# Allegro board probe_d_F2.brd
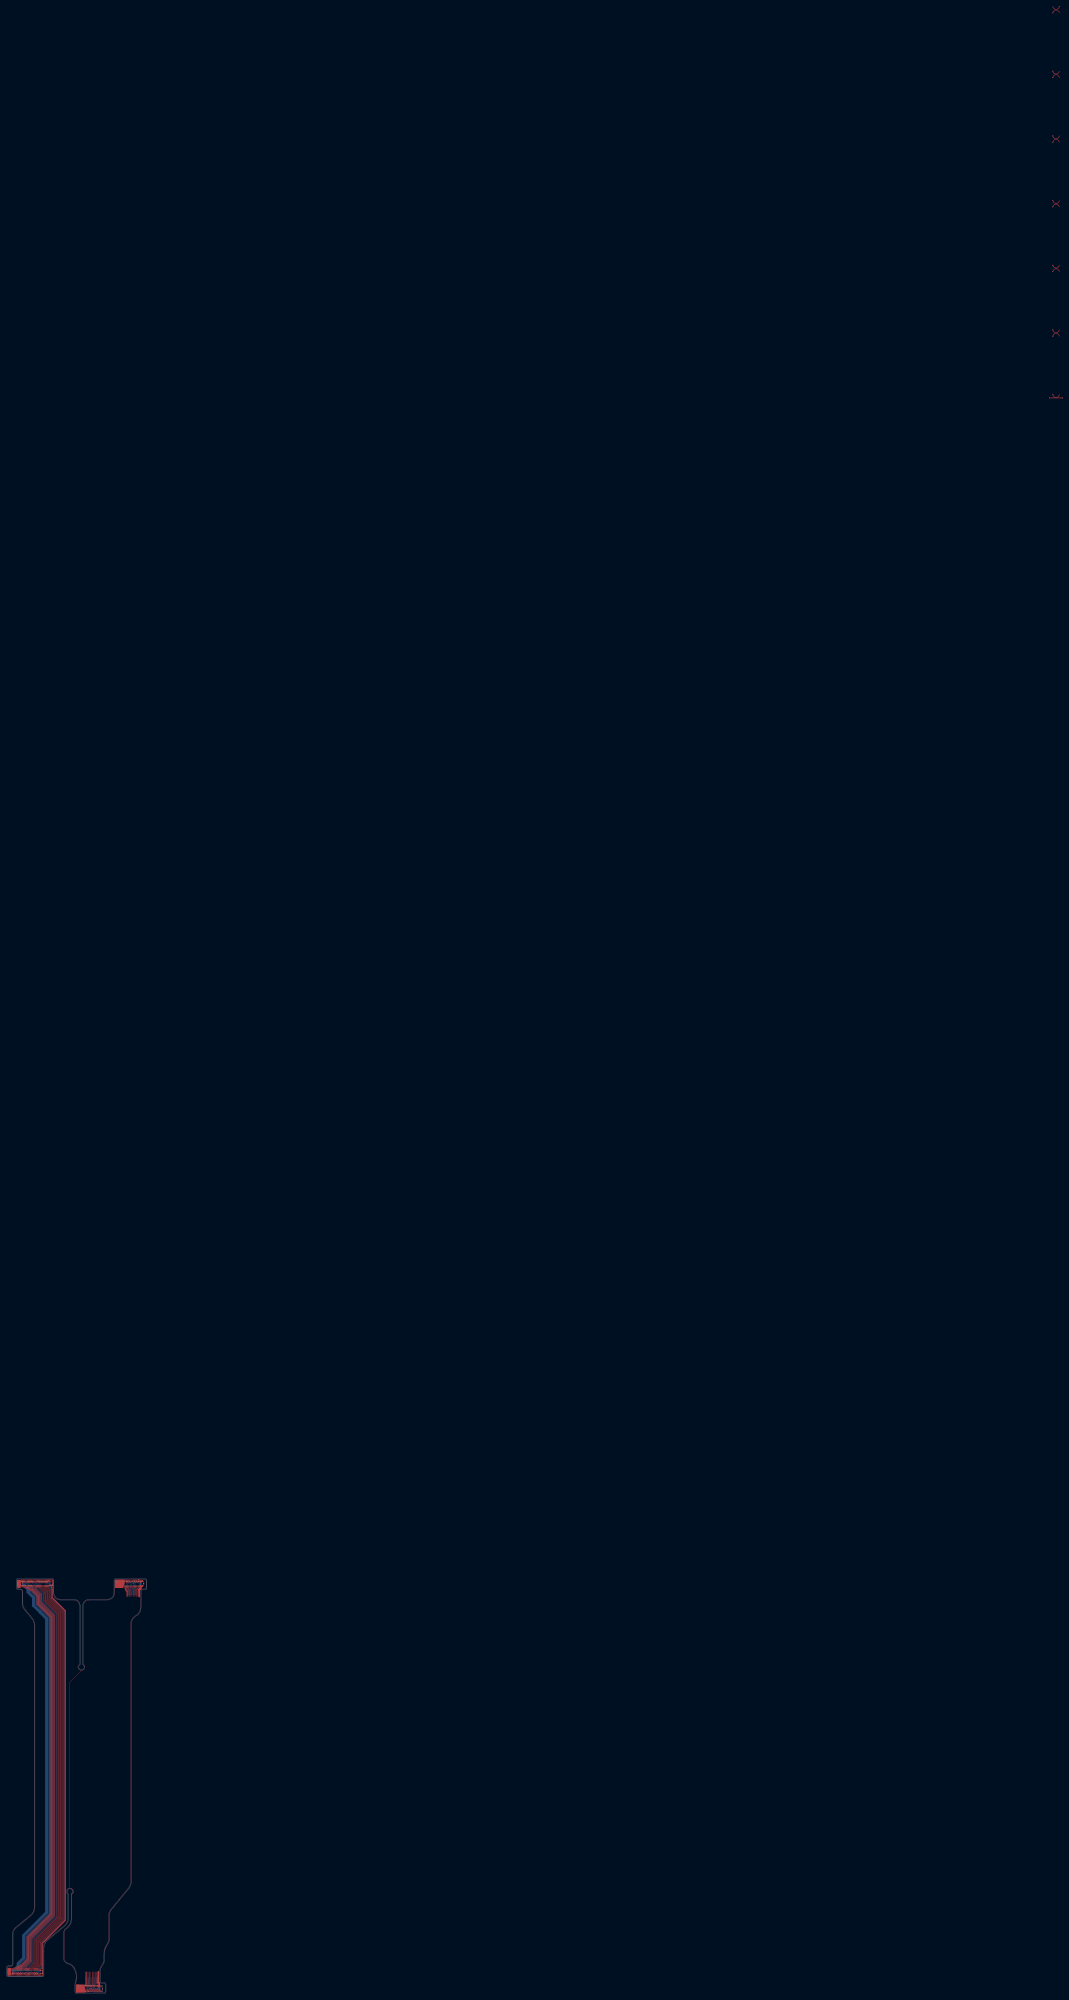
[diagram p0: board, top side]
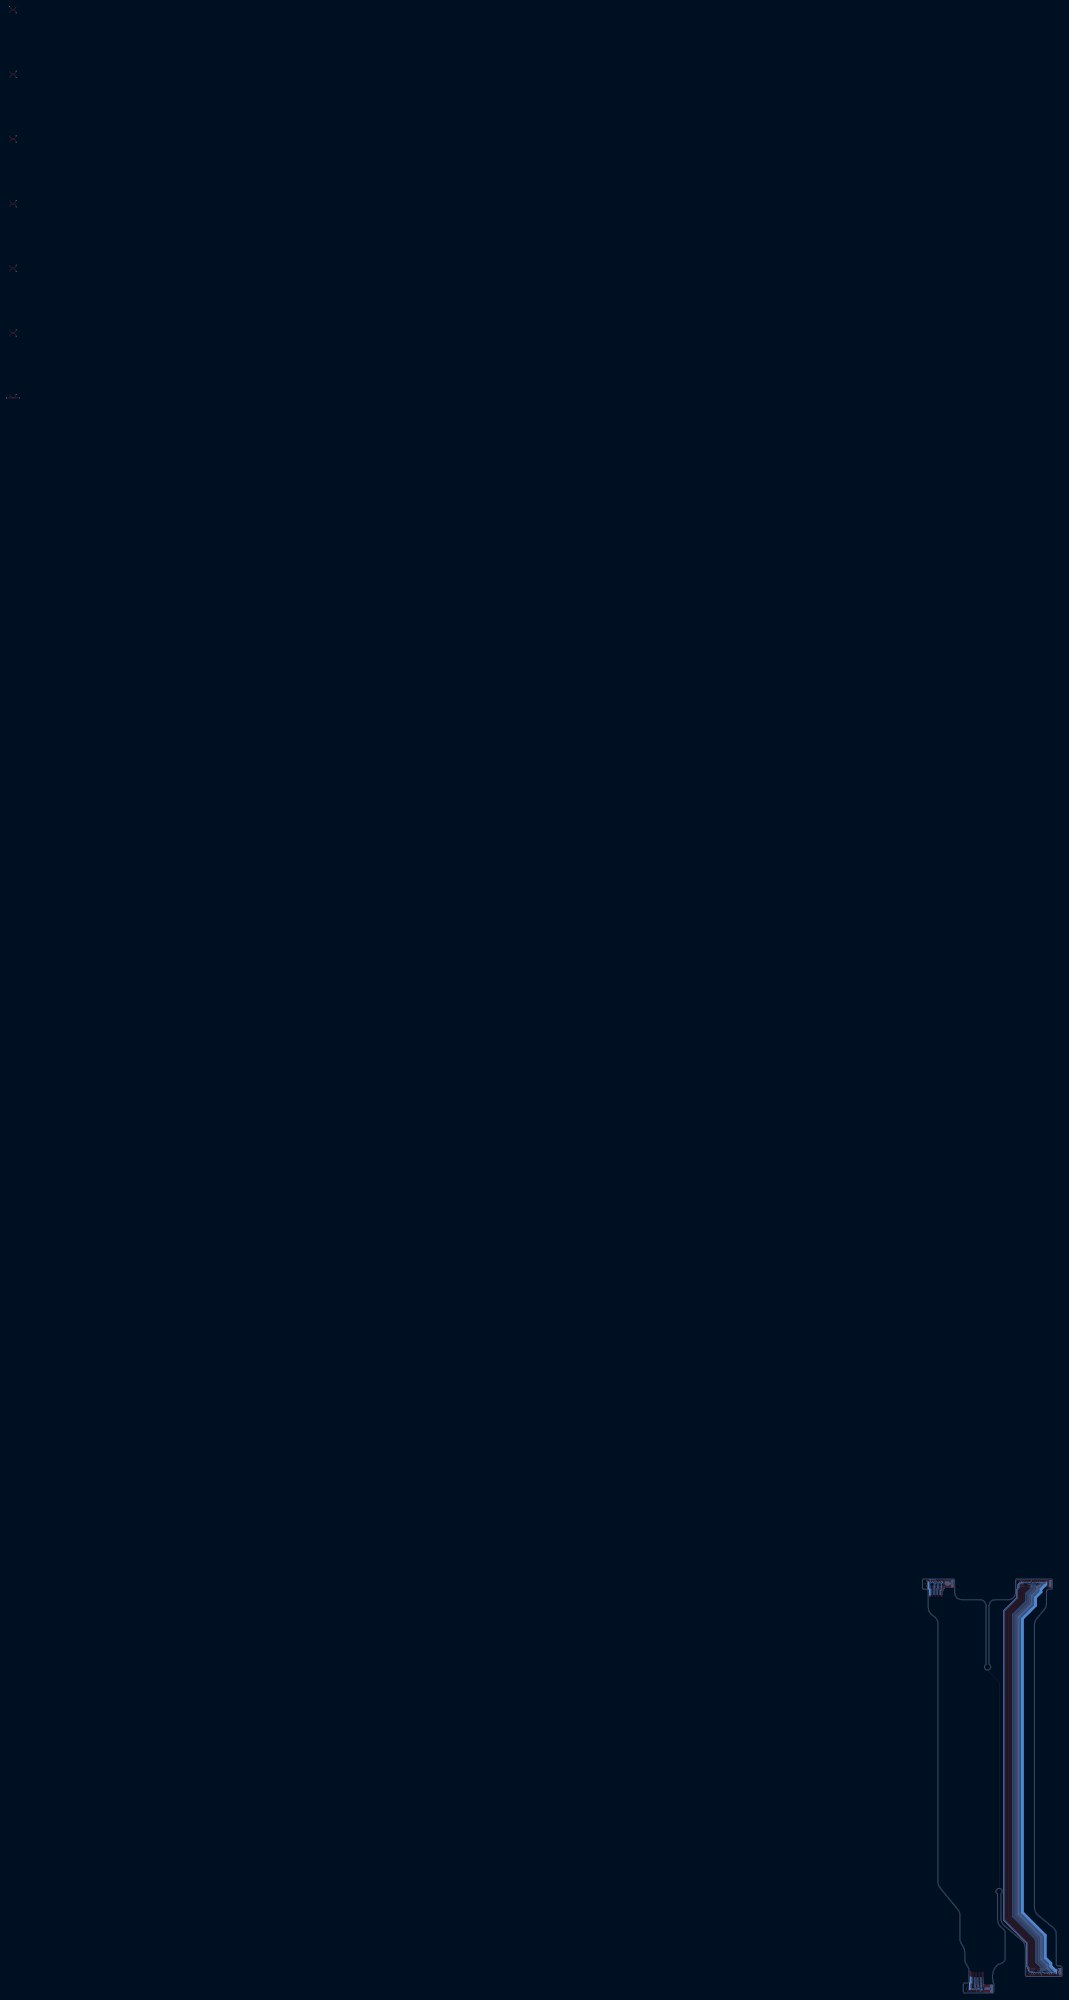
[diagram p1: board, bottom side, seen from below]

Outline 43.41 x 128.27 mm; copper layers: TOP, BOTTOM. Coordinates in mm from the lower left corner of the outline.
Outline path: 0,8.06 0,5.66 arc(0.15,5.31) 0.5,5.16 11.1,5.16 arc(11.45,5.31) 11.6,5.66 11.6,14.1 arc(11.63,14.54) 11.73,14.97 arc(12.1,15.75) 12.67,16.4 18.11,20.96 arc(18.9,21.99) 19.18,23.26 19.18,30.8 arc(19.58,32.4) 19.98,30.8 19.98,22.89 arc(19.7,21.62) 18.91,20.59 18.31,20.09 arc(17.79,19.4) 17.6,18.56 17.6,11.08 arc(17.64,10.67) 17.76,10.29 arc(18.35,9.52) 19.22,9.11 arc(19.39,9.07) 19.56,9.01 arc(20.03,8.76) 20.42,8.4 arc(21.51,5.93) 21.21,3.25 arc(21.19,3.16) 21.18,3.07 21.18,0.5 arc(21.33,0.15) 21.68,0 30.28,0 arc(30.63,0.15) 30.78,0.5 30.78,2.9 arc(30.63,3.25) 30.28,3.4 29.48,3.4 arc(29.13,3.55) 28.98,3.9 28.98,6.97 arc(29.05,7.49) 29.25,7.97 29.85,9.01 arc(29.9,9.1) 29.94,9.18 arc(29.99,9.27) 30.03,9.35 arc(30.07,9.43) 30.11,9.52 arc(30.14,9.6) 30.18,9.68 arc(30.21,9.76) 30.23,9.84 arc(30.25,9.91) 30.27,9.99 arc(30.3,10.14) 30.31,10.29 30.4,13.12 arc(30.41,13.33) 30.45,13.54 arc(30.48,13.65) 30.52,13.76 arc(30.56,13.87) 30.6,13.98 arc(30.66,14.1) 30.71,14.22 arc(30.78,14.34) 30.84,14.46 arc(30.91,14.59) 30.99,14.71 arc(31.07,14.84) 31.15,14.97 31.41,15.42 arc(31.71,16.15) 31.81,16.92 31.81,24.04 arc(31.99,25.06) 32.49,25.95 37.9,32.54 arc(38.29,33.14) 38.52,33.83 arc(38.54,33.94) 38.55,34.05 arc(38.57,34.24) 38.58,34.44 38.58,114.11 arc(38.99,115.61) 40.09,116.71 arc(41.2,117.81) 41.61,119.32 41.61,124.37 arc(41.76,124.72) 42.11,124.87 42.91,124.87 arc(43.26,125.02) 43.41,125.37 43.41,127.77 arc(43.26,128.12) 42.91,128.27 33.76,128.27 arc(33.41,128.12) 33.26,127.77 33.26,123.91 arc(33.24,123.64) 33.19,123.38 arc(32.47,122.32) 31.26,121.91 25.58,121.91 arc(24.22,121.37) 23.59,120.06 arc(23.58,119.98) 23.58,119.91 23.58,101.71 arc(23.18,100.11) 22.78,101.71 22.78,119.91 arc(22.78,119.98) 22.77,120.06 arc(22.14,121.37) 20.78,121.91 16.65,121.91 arc(15.44,122.32) 14.72,123.38 arc(14.67,123.64) 14.65,123.91 14.65,127.77 arc(14.5,128.12) 14.15,128.27 3.55,128.27 arc(3.2,128.12) 3.05,127.77 3.05,125.37 arc(3.2,125.02) 3.55,124.87 4.35,124.87 arc(4.7,124.72) 4.85,124.37 4.85,120.62 arc(4.86,120.34) 4.9,120.06 arc(5.14,119.34) 5.54,118.7 7.89,115.87 arc(8.4,114.97) 8.58,113.96 8.58,26.61 arc(8.29,25.33) 7.49,24.3 2.89,20.5 arc(2.09,19.46) 1.8,18.18 1.8,9.06 arc(1.8,9.04) 1.8,9.01 arc(1.64,8.69) 1.3,8.56 0.5,8.56 arc(0.15,8.41) 0,8.06

## Design rules (mm)
constraint set DEFAULT: min track width 0.06, pair gap 0.075
net group DP1: nets USB_DM_CON USB_DP_CON
nets with their own width: min track width 0.06; nets GND

## Placement (name value [footprint] x y rotation side)
J101  OK-B212208RM040/2-35  [BTB-40M_OK-B212208RM040-2_OP]  38.33 126.77 0 top
J102  WP26DKL-PL50VA3-R15000  [BTB-50M_WP26DKL-PL50VA3_OP]  5.8 6.67 180 top
J105  WP26DKL-PL50VA3-R15000  [BTB-50M_WP26DKL-PL50VA3_OP]  8.85 126.81 180 top
J106  -  [BTB-40M_JM6E-M03XX0431_OP]  25.98 1.5 0 top

## Library data of the parts
J101 = BTB-40M_OK-B212208RM040-2_OP
J102 J105 = BTB-50M_WP26DKL-PL50VA3_OP
J106 = BTB-40M_JM6E-M03XX0431_OP

## Footprints (pads in the part's own frame, mm; a bottom-side part is the same pattern mirrored in y, then rotated)
BTB-40M_JM6E-M03XX0431_OP
  rrect 0.15x0.525 smd: 1(-2.85,0.688) 2(-2.55,0.688) 3(-2.25,0.688) 4(-1.95,0.688) 5(-1.65,0.688) 6(-1.35,0.688) 7(-1.05,0.688) 8(-0.75,0.688) 9(-0.45,0.688) 10(-0.15,0.688) 11(0.15,0.688) 12(0.45,0.688) 13(0.75,0.688) 14(1.05,0.688) 15(1.35,0.688) 16(1.65,0.688) 17(1.95,0.688) 18(2.25,0.688) 19(2.55,0.688) 20(2.85,0.688) 21(2.85,-0.688) 22(2.55,-0.688) 23(2.25,-0.688) 24(1.95,-0.688) 25(1.65,-0.688) 26(1.35,-0.688) 27(1.05,-0.688) 28(0.75,-0.688) 29(0.45,-0.688) 30(0.15,-0.688) 31(-0.15,-0.688) 32(-0.45,-0.688) 33(-0.75,-0.688) 34(-1.05,-0.688) 35(-1.35,-0.688) 36(-1.65,-0.688) 37(-1.95,-0.688) 38(-2.25,-0.688) 39(-2.55,-0.688) 40(-2.85,-0.688)
  rrect 0.32x0.585 smd: 41(-3.235,-0.657) 43(-3.235,0.657) 44(3.235,0.657) 46(3.235,-0.657)
  rrect 0.21x0.5 smd: 42(-3.73,0) 45(3.73,0)
BTB-40M_OK-B212208RM040-2_OP
  rect 0.18x0.49 smd: 1(-3.325,0.91) 2(-2.975,0.91) 3(-2.625,0.91) 4(-2.275,0.91) 5(-1.925,0.91) 6(-1.575,0.91) 7(-1.225,0.91) 8(-0.875,0.91) 9(-0.525,0.91) 10(-0.175,0.91) 11(0.175,0.91) 12(0.525,0.91) 13(0.875,0.91) 14(1.225,0.91) 15(1.575,0.91) 16(1.925,0.91) 17(2.275,0.91) 18(2.625,0.91) 19(2.975,0.91) 20(3.325,0.91) 21(3.325,-0.91) 22(2.975,-0.91) 23(2.625,-0.91) 24(2.275,-0.91) 25(1.925,-0.91) 26(1.575,-0.91) 27(1.225,-0.91) 28(0.875,-0.91) 29(0.525,-0.91) 30(0.175,-0.91) 31(-0.175,-0.91) 32(-0.525,-0.91) 33(-0.875,-0.91) 34(-1.225,-0.91) 35(-1.575,-0.91) 36(-1.925,-0.91) 37(-2.275,-0.91) 38(-2.625,-0.91) 39(-2.975,-0.91) 40(-3.325,-0.91)
  rect 0.33x0.54 smd: 41(-3.725,-0.77) 43(-3.725,0.77) 44(3.725,0.77) 46(3.725,-0.77)
  rect 0.26x0.42 smd: 42(-4.115,0) 45(4.115,0)
BTB-50M_WP26DKL-PL50VA3_OP
  rect 0.17x0.7 smd: 1(-4.2,0.83) 2(-3.85,0.83) 3(-3.5,0.83) 4(-3.15,0.83) 5(-2.8,0.83) 6(-2.45,0.83) 7(-2.1,0.83) 8(-1.75,0.83) 9(-1.4,0.83) 10(-1.05,0.83) 11(-0.7,0.83) 12(-0.35,0.83) 13(0,0.83) 14(0.35,0.83) 15(0.7,0.83) 16(1.05,0.83) 17(1.4,0.83) 18(1.75,0.83) 19(2.1,0.83) 20(2.45,0.83) 21(2.8,0.83) 22(3.15,0.83) 23(3.5,0.83) 24(3.85,0.83) 25(4.2,0.83) 26(4.2,-0.83) 27(3.85,-0.83) 28(3.5,-0.83) 29(3.15,-0.83) 30(2.8,-0.83) 31(2.45,-0.83) 32(2.1,-0.83) 33(1.75,-0.83) 34(1.4,-0.83) 35(1.05,-0.83) 36(0.7,-0.83) 37(0.35,-0.83) 38(0,-0.83) 39(-0.35,-0.83) 40(-0.7,-0.83) 41(-1.05,-0.83) 42(-1.4,-0.83) 43(-1.75,-0.83) 44(-2.1,-0.83) 45(-2.45,-0.83) 46(-2.8,-0.83) 47(-3.15,-0.83) 48(-3.5,-0.83) 49(-3.85,-0.83) 50(-4.2,-0.83)
  rect 0.28x0.65 smd: 51(-4.62,-0.575) 52(-4.62,0.575) 53(4.62,0.575) 54(4.62,-0.575)

## Nets
GND: J101.8 J101.16 J101.18 J101.23 J101.27 J101.30 J101.33 J101.44 J101.45 J101.46 J102.6 J102.12 J102.18 J102.22 J102.27 J102.32 J102.38 J102.40 J102.51 J102.52 J105.11 J105.13 J105.19 J105.24 J105.29 J105.33 J105.39 J105.45 J105.51 J105.52 J106.8 J106.11 J106.14 J106.18 J106.23 J106.25 J106.33 J106.44 J106.45 J106.46
VBUS_USB_IN: J101.1 J101.2 J101.3 J101.4 J101.5 J101.37 J101.38 J101.39 J101.40 J101.41 J101.42 J101.43 J106.1 J106.2 J106.3 J106.4 J106.36 J106.37 J106.38 J106.39 J106.40 J106.41 J106.42 J106.43
ANT_ID0: J101.9 J106.32
AU_MICBIAS0: J101.24 J106.17
BB_SUB_BATBOX_ADC3: J101.12 J106.29
BB_USB_ADC1: J101.11 J106.30
BB_USB_ADC2: J101.13 J106.28
BPI_D_BUS0: J101.15 J106.26
BPI_D_BUS4: J101.14 J106.27
CARD_DET: J102.37 J105.14
EINT_CTP: J102.21 J105.30
FINGER_SPI_CLK: J102.13 J105.38
FINGER_SPI_CS_N: J102.16 J105.35
FINGER_SPI_MISO: J102.17 J105.34
FINGER_SPI_MOSI: J102.15 J105.36
FP_RST: J102.14 J105.37
GPIO_CTP_RSTB: J102.11 J105.40
LCD_VCI_3V0: J102.3 J105.48
LCD_VDDI: J102.19 J105.32
LCD_VDDR_1V25: J102.24 J105.27
LCD_VDDR_1V25_FB: J102.23 J105.28
MAIN_MIC_M: J101.26 J106.15
MAIN_MIC_P: J101.25 J106.16
MIPI2_D_SCLK: J101.28 J106.13
MIPI2_D_SDATA: J101.29 J106.12
MIPI_DSI0_CLK_M_CON: J102.43 J105.8
MIPI_DSI0_CLK_P_CON: J102.44 J105.7
MIPI_DSI0_LANE0_M_CON: J102.41 J105.10
MIPI_DSI0_LANE0_P_CON: J102.42 J105.9
MIPI_DSI0_LANE1_M_CON: J102.45 J105.6
MIPI_DSI0_LANE1_P_CON: J102.46 J105.5
MIPI_DSI0_LANE2_M_CON: J102.49 J105.2
MIPI_DSI0_LANE2_P_CON: J102.50 J105.1
MIPI_DSI0_LANE3_M_CON: J102.47 J105.4
MIPI_DSI0_LANE3_P_CON: J102.48 J105.3
NFC_SWP: J102.39 J105.12
NFC_VDD_SIM_1_OUT: J102.31 J105.20
OLED_NTC: J101.10 J106.31
OLED_RST: J102.5 J105.46
OLED_TE: J102.4 J105.47
SIM1_SCLK: J102.28 J105.23
SIM1_SIO: J102.30 J105.21
SIM1_SRST: J102.29 J105.22
SIM2_SCLK_CARD: J102.33 J105.18
SIM2_SIO_CARD: J102.35 J105.16
SIM2_SRST_CARD: J102.34 J105.17
SPK_OUT_M: J101.19 J101.20 J106.21 J106.22
SPK_OUT_P: J101.21 J101.22 J106.19 J106.20
TP_1V8: J102.2 J105.49
TP_SPI_CLK: J102.7 J105.44
TP_SPI_CS: J102.8 J105.43
TP_SPI_MI: J102.10 J105.41
TP_SPI_MO: J102.9 J105.42
USB_CC1: J101.34 J106.7
USB_CC2: J101.35 J106.6
USB_CONTACT_IN: J101.17 J106.24
USB_DM_CON: J101.32 J106.9
USB_DP_CON: J101.31 J106.10
VFP_PMU: J102.1 J105.50
VIBR_PMU: J101.7 J106.34
VSIM2_PMU_CARD: J102.36 J105.15
VSYS: J102.53 J102.54 J105.53 J105.54
VTP_PMU: J102.20 J105.31

Pads without a net: J101 6 36; J102 25 26; J105 25 26; J106 5 35

## Via types
v1: diameter 0.3, hole 0.1, TOP to BOTTOM, 194 vias

## Routing (per net, layer and track width the routed paths; a pad name or vN(x,y) marks a point on that pad's centre or on a via; arc(x,y) is an arc through that point)
GND: length 2633.2
  TOP w0.06: 6.5,7.71 6.2,8.01 6.2,8.26 7.91,9.97 7.91,16.91 14.98,23.99 14.98,117 10.94,121.04 10.94,123.53 9.25,125.22 9.25,125.41 9.55,125.72 9.55,125.77 ; 6.5,7.71 8.51,9.72 8.51,16.66 15.58,23.74 15.58,117.25 11.54,121.29 11.54,123.78 11.53,123.79 11.52,123.79 9.55,125.77 ; 6.5,7.71 J102.40 ; v1(25.23,0.81) 25.23,0.35 25.11,0.23 21.68,0.23 arc(21.49,0.31) 21.41,0.5 21.41,3.07 arc(21.41,3.12) 21.43,3.17 arc(21.74,5.97) 20.6,8.54 arc(20.16,8.95) 19.64,9.23 arc(19.46,9.29) 19.27,9.34 arc(18.49,9.7) 17.97,10.38 arc(17.87,10.72) 17.83,11.08 17.83,18.56 arc(18,19.31) 18.46,19.91 19.06,20.41 arc(19.91,21.52) 20.21,22.89 20.21,30.67 ; 9.55,125.77 J105.11 ; v1(40.95,128.02) J101.18 v1(40.95,127.3) ; 40.7,122.75 40.7,124.92 arc(40.71,124.95) 40.72,124.98 40.93,125.19 arc(40.95,125.21) 40.95,125.24 J101.23 40.9,125.8 40.9,125.49 40.46,125.05 40.46,122.75 ; J102.27 1.95,7.71 2.3,8.06 2.66,8.06 2.78,8.18 2.96,8.18 3.31,8.53 3.51,8.53 3.63,8.65 3.81,8.65 3.93,8.77 4.11,8.77 4.23,8.89 4.41,8.89 6.24,10.71 6.24,17.6 13.31,24.68 13.31,116.31 9.27,120.35 9.27,122.84 7.64,124.47 7.22,124.47 6.86,124.83 6.48,124.83 6.01,125.3 5.83,125.3 5.71,125.41 5.53,125.41 5.41,125.54 5.23,125.54 5,125.77 J105.24 ; 39.5,122.75 39.5,125.2 39.39,125.3 39.39,125.59 39.55,125.75 ; 25.23,2.32 24.96,2.59 24.96,6.68 ; 25.23,2.32 25.23,2.34 25.38,2.49 25.38,6.68 ; 25.23,2.32 J106.8 ; 26.13,2.32 26.51,2.7 26.51,6.68 ; 26.13,2.32 26.13,2.35 25.91,2.57 25.91,6.68 ; 26.13,2.32 J106.11 ; 37.66,122.75 37.66,124.43 37.27,124.82 37.27,125.57 37.45,125.75 ; 26.87,6.68 26.87,2.54 27.03,2.38 27.03,2.34 ; 27.83,6.68 27.83,3.21 28.11,2.93 28.11,2.44 28.23,2.32 ; 39.55,125.75 J101.27 ; 39.55,125.75 39.55,125.72 39.75,125.52 39.85,125.52 39.98,125.39 39.98,122.75 ; 26.85,0.23 30.28,0.23 arc(30.47,0.31) 30.55,0.5 30.55,2.9 arc(30.47,3.09) 30.28,3.17 29.48,3.17 arc(28.96,3.38) 28.75,3.9 28.75,6.97 arc(28.83,7.55) 29.05,8.09 29.65,9.13 arc(29.69,9.21) 29.74,9.29 arc(29.78,9.38) 29.82,9.46 arc(29.86,9.53) 29.9,9.61 arc(29.93,9.69) 29.96,9.76 arc(29.99,9.83) 30.01,9.9 arc(30.03,9.97) 30.05,10.04 arc(30.07,10.17) 30.08,10.29 30.17,13.12 arc(30.19,13.36) 30.23,13.59 arc(30.26,13.71) 30.3,13.83 arc(30.34,13.95) 30.39,14.07 arc(30.45,14.2) 30.51,14.32 arc(30.57,14.45) 30.64,14.57 arc(30.72,14.7) 30.79,14.83 arc(30.87,14.96) 30.95,15.08 31.21,15.54 arc(31.49,16.2) 31.58,16.92 31.58,24.04 arc(31.77,25.13) 32.31,26.09 37.72,32.68 arc(38.08,33.24) 38.29,33.87 arc(38.31,33.98) 38.33,34.08 arc(38.34,34.26) 38.35,34.44 38.35,114.11 arc(38.79,115.73) 39.98,116.91 arc(41,117.93) 41.38,119.32 41.38,124.37 arc(41.59,124.89) 42.11,125.1 42.91,125.1 arc(43.1,125.18) 43.18,125.37 43.18,127.77 arc(43.1,127.96) 42.91,128.04 33.76,128.04 arc(33.57,127.96) 33.49,127.77 33.49,123.91 arc(33.47,123.61) 33.41,123.32 arc(32.61,122.13) 31.26,121.68 25.58,121.68 arc(24.38,121.2) 23.82,120.04 arc(23.81,119.97) 23.81,119.91 23.81,101.83 arc(24.21,100.62) 23.18,99.88 ; 38.01,122.75 38.01,124.5 arc(38,124.57) 37.96,124.63 37.67,124.92 arc(37.63,124.98) 37.61,125.05 37.61,125.4 arc(37.6,125.47) 37.56,125.53 37.49,125.6 arc(37.46,125.64) 37.45,125.69 37.45,125.75 ; J102.51 10.42,7.43 10.22,7.62 10.22,8.09 10.82,8.68 10.82,15.71 17.89,22.78 17.89,118.21 13.85,122.25 13.85,124.79 13.32,125.31 13.32,126.09 J105.52 ; 37.45,125.75 J101.33 ; 37.12,122.75 37.12,124.21 36.73,124.6 36.73,125.21 v1(36.6,125.34) ; J101.30 38.5,125.71 ; 38.5,125.71 38.2,125.41 38.2,125.13 38.54,124.8 38.54,122.75 ; 38.5,125.71 38.5,125.68 39.14,125.05 39.14,122.75 ; 24.42,6.68 24.42,2.8 v1(24.3,2.67) ; J102.18 v1(4.05,6.26) ; J106.23 v1(28.23,1.44) ; J101.16 v1(40.25,127.3) ; J105.33 v1(7.1,127.22) ; 27.35,6.68 27.35,2.66 27.03,2.34 ; 27.03,2.34 J106.14 ; J106.25 v1(27.63,1.44) ; 23.18,99.88 23.18,99.86 19.58,96.26 19.58,32.63 arc(20.61,31.88) 20.21,30.67 ; 23.18,99.88 arc(22.15,100.63) 22.55,101.83 22.55,119.91 arc(22.55,119.97) 22.54,120.04 arc(21.98,121.2) 20.78,121.68 16.65,121.68 arc(15.3,122.13) 14.5,123.32 arc(14.44,123.61) 14.42,123.91 14.42,127.77 arc(14.34,127.96) 14.15,128.04 3.55,128.04 arc(3.36,127.96) 3.28,127.77 3.28,125.37 arc(3.36,125.18) 3.55,125.1 4.35,125.1 arc(4.87,124.89) 5.08,124.37 5.08,120.62 arc(5.09,120.36) 5.13,120.1 arc(5.34,119.44) 5.72,118.85 8.07,116.02 arc(8.62,115.05) 8.81,113.96 8.81,26.61 arc(8.5,25.23) 7.64,24.12 3.04,20.32 arc(2.29,19.36) 2.03,18.18 2.03,9.06 arc(2.03,9.03) 2.03,8.99 arc(1.79,8.52) 1.3,8.33 0.5,8.33 arc(0.31,8.25) 0.23,8.06 0.23,5.66 arc(0.31,5.47) 0.5,5.39 11.1,5.39 arc(11.29,5.47) 11.37,5.66 11.37,14.1 arc(11.4,14.57) 11.51,15.03 arc(11.9,15.88) 12.52,16.57 17.96,21.14 arc(18.69,22.09) 18.95,23.26 18.95,30.67 arc(19.58,32.63) 20.21,30.67 ; 28.23,2.32 J106.18 ; 28.23,2.32 28.23,2.36 28.35,2.48 28.35,3.03 28.07,3.31 28.07,6.68 ; J102.6 v1(8.25,6.34) ; J105.13 8.85,125.71 9.01,125.56 9.01,125.12 10.7,123.43 10.7,120.94 14.74,116.9 14.74,24.09 7.67,17.01 7.67,10.07 5.96,8.36 5.96,7.94 5.8,7.78 J102.38 ; J105.19 6.75,125.77 6.98,125.54 7.16,125.54 7.52,125.18 7.93,125.18 9.98,123.13 9.98,120.64 14.02,116.6 14.02,24.39 6.95,17.31 6.95,10.42 4.71,8.18 4.53,8.18 4.41,8.06 4.23,8.06 4.11,7.94 3.93,7.94 3.7,7.71 J102.32 ; J105.29 v1(5.7,127.22) ; J102.22 v1(2.65,6.26) ; J101.8 v1(37.45,127.3)
  TOP w0.15: J105.45 v1(11.3,127.22)
  BOTTOM w0.06: 25.63,1.61 25.63,1.47 25.82,1.28 25.82,0.34 25.93,0.23 ; 25.63,1.61 25.45,1.78 25.45,3.08 25.5,3.12 25.5,5.06 ; 25.63,1.61 25.63,1.67 25.89,1.93 25.89,2.76 26.03,2.9 26.03,5.06 ; 25.05,5.06 25.05,3.31 25,3.26 25,1.65 24.68,1.33 ; 38.54,123.23 38.54,124.8 38.2,125.13 38.2,126.78 38.06,126.92 37.7,126.92 ; v1(4.05,6.26) 4.05,6.44 5.12,7.51 5.12,8.71 6.83,10.42 6.83,17.36 13.9,24.44 13.9,116.55 9.86,120.59 9.86,123.08 8.17,124.77 8.17,125.97 7.1,127.04 v1(7.1,127.22) ; 6.63,5.39 11.1,5.39 arc(11.29,5.47) 11.37,5.66 11.37,14.1 arc(11.4,14.57) 11.51,15.03 arc(11.9,15.88) 12.52,16.57 17.96,21.14 arc(18.69,22.09) 18.95,23.26 18.95,30.67 arc(19.58,32.63) 20.21,30.67 20.21,22.89 arc(19.91,21.52) 19.06,20.41 18.46,19.91 arc(18,19.31) 17.83,18.56 17.83,11.08 arc(17.87,10.72) 17.97,10.38 arc(18.49,9.7) 19.27,9.34 arc(19.46,9.29) 19.64,9.23 arc(20.16,8.95) 20.6,8.54 arc(21.74,5.97) 21.43,3.17 arc(21.41,3.12) 21.41,3.07 21.41,0.5 arc(21.49,0.31) 21.68,0.23 25.11,0.23 25.23,0.35 v1(25.23,0.81) 25,0.81 24.68,1.13 24.68,1.33 ; 6.63,5.39 6.6,5.41 6.6,6.61 6.2,7.01 ; 6.63,5.39 0.5,5.39 arc(0.31,5.47) 0.23,5.66 0.23,8.06 arc(0.31,8.25) 0.5,8.33 1.3,8.33 arc(1.79,8.52) 2.03,8.99 arc(2.03,9.03) 2.03,9.06 2.03,18.18 arc(2.29,19.36) 3.04,20.32 7.64,24.12 arc(8.5,25.23) 8.81,26.61 8.81,113.96 arc(8.62,115.05) 8.07,116.02 5.72,118.85 arc(5.34,119.44) 5.13,120.1 arc(5.09,120.36) 5.08,120.62 5.08,124.37 arc(4.87,124.89) 4.35,125.1 3.55,125.1 arc(3.36,125.18) 3.28,125.37 3.28,127.77 arc(3.36,127.96) 3.55,128.04 9.59,128.04 ; v1(5.7,127.22) 5.8,127.11 5.8,126.93 7.42,125.32 7.42,124.46 9.11,122.77 9.11,120.28 13.15,116.24 13.15,24.75 6.08,17.67 6.08,10.73 4.37,9.02 4.37,8.16 2.65,6.44 v1(2.65,6.26) ; 24.68,1.33 24.68,1.75 24.3,2.14 v1(24.3,2.67) 24.42,2.8 24.42,5.06 ; 25.93,0.23 25.35,0.23 ; 25.93,0.23 26.85,0.23 ; 40.95,127.68 v1(40.95,128.02) 40.9,128.04 39.28,128.04 39.28,127.18 39.08,126.98 39.08,126.78 ; 9.59,128.04 14.15,128.04 arc(14.34,127.96) 14.42,127.77 14.42,123.91 arc(14.44,123.61) 14.5,123.32 arc(15.3,122.13) 16.65,121.68 20.78,121.68 arc(21.98,121.2) 22.54,120.04 arc(22.55,119.97) 22.55,119.91 22.55,101.83 arc(23.18,99.88) 23.81,101.83 23.81,119.91 arc(23.81,119.97) 23.82,120.04 arc(24.38,121.2) 25.58,121.68 31.26,121.68 arc(32.61,122.13) 33.41,123.32 arc(33.47,123.61) 33.49,123.91 33.49,127.77 arc(33.57,127.96) 33.76,128.04 42.91,128.04 arc(43.1,127.96) 43.18,127.77 43.18,125.37 arc(43.1,125.18) 42.91,125.1 42.11,125.1 arc(41.59,124.89) 41.38,124.37 41.38,119.32 arc(41,117.93) 39.98,116.91 arc(38.79,115.73) 38.35,114.11 38.35,34.44 arc(38.34,34.26) 38.33,34.08 arc(38.31,33.98) 38.29,33.87 arc(38.08,33.24) 37.72,32.68 32.31,26.09 arc(31.77,25.13) 31.58,24.04 31.58,16.92 arc(31.49,16.2) 31.21,15.54 30.95,15.08 arc(30.87,14.96) 30.79,14.83 arc(30.72,14.7) 30.64,14.57 arc(30.57,14.45) 30.51,14.32 arc(30.45,14.2) 30.39,14.07 arc(30.34,13.95) 30.3,13.83 arc(30.26,13.71) 30.23,13.59 arc(30.19,13.36) 30.17,13.12 30.08,10.29 arc(30.07,10.17) 30.05,10.04 arc(30.03,9.97) 30.01,9.9 arc(29.99,9.83) 29.96,9.76 arc(29.93,9.69) 29.9,9.61 arc(29.86,9.53) 29.82,9.46 arc(29.78,9.38) 29.74,9.29 arc(29.69,9.21) 29.65,9.13 29.05,8.09 arc(28.83,7.55) 28.75,6.97 28.75,3.9 arc(28.96,3.38) 29.48,3.17 30.28,3.17 arc(30.47,3.09) 30.55,2.9 30.55,0.5 arc(30.47,0.31) 30.28,0.23 26.85,0.23 ; 9.59,128.04 9.59,128.04 9.59,126.9 9.25,126.55 ; 26.85,0.23 26.48,0.59 26.48,1.33 26.65,1.5 26.65,1.69 ; 39.14,123.23 39.14,125.05 38.8,125.38 38.8,126.5 39.08,126.78 ; 8.25,6.48 7.6,7.13 6.94,7.13 6.8,7.27 6.8,8.01 8.51,9.72 8.51,16.66 15.58,23.74 15.58,117.25 11.54,121.29 11.54,123.78 9.85,125.48 9.85,126.3 9.92,126.37 10.64,126.37 11.19,126.93 11.19,127.11 v1(11.3,127.22) 11.4,127.11 11.4,126.93 11.82,126.52 13,126.52 13.26,126.26 13.26,125.37 13.85,124.79 13.85,122.25 17.89,118.21 17.89,22.78 10.79,15.68 10.79,8.65 10.21,8.07 10.21,7.21 10.04,7.05 8.82,7.05 8.25,6.48 ; 8.25,6.48 v1(8.25,6.34) ; 6.2,7.01 5.96,7.26 5.96,8.36 7.67,10.07 7.67,17.01 14.74,24.09 14.74,116.9 10.7,120.94 10.7,123.43 9.01,125.12 9.01,126.31 9.25,126.55 ; 6.2,7.01 6.2,8.26 7.91,9.97 7.91,16.91 14.98,23.99 14.98,117 10.94,121.04 10.94,123.53 9.25,125.22 9.25,126.55 ; 40.25,127.17 40.25,127.01 39.83,126.59 39.83,125.54 39.98,125.39 39.98,123.23 ; 40.25,127.17 v1(40.25,127.3) ; 40.25,127.17 40.5,126.92 40.68,126.92 40.9,126.71 40.9,125.49 40.46,125.05 40.46,123.23 ; 37.66,123.23 37.66,124.4 arc(37.65,124.43) 37.64,124.45 37.3,124.8 arc(37.28,124.82) 37.27,124.85 37.27,126.62 arc(37.27,126.65) 37.25,126.67 36.86,127.07 ; 36.86,127.07 36.86,127.27 37,127.41 37.34,127.41 v1(37.45,127.3) 37.45,127.17 37.7,126.92 ; 36.86,127.07 36.86,126.34 36.6,126.09 v1(36.6,125.34) 36.79,125.15 36.79,124.62 37.17,124.24 37.17,123.23 ; 39.5,123.23 39.5,125.2 39.35,125.34 39.35,126.51 39.08,126.78 ; 37.7,126.92 37.62,126.84 37.62,124.96 38.01,124.58 38.01,123.23 ; 26.87,5.06 26.87,2.71 26.79,2.63 26.79,1.83 26.65,1.69 ; 26.65,1.69 26.37,1.97 26.37,2.56 26.51,2.7 26.51,5.06 ; 27.35,5.06 27.35,2.51 27.27,2.43 27.27,1.8 v1(27.63,1.44) 27.7,1.44 28.11,1.84 28.11,2.93 27.83,3.21 27.83,5.06 ; v1(40.95,127.3) 41.14,127.12 41.14,125.39 40.7,124.95 40.7,123.23 ; 28.07,5.06 28.07,3.31 28.35,3.03 28.35,1.56 v1(28.23,1.44)
  BOTTOM w0.15: v1(40.95,127.3) 40.95,127.68
VBUS_USB_IN:
  vias: v1(21.68,2.59) v1(21.68,2.29) v1(21.68,1.99) v1(21.68,1.69) v1(21.68,1.39) v1(21.68,1.09) v1(21.68,0.79) v1(21.68,0.49) v1(21.98,2.59) v1(21.98,2.29) v1(21.98,1.99) v1(21.98,1.69) v1(21.98,1.39) v1(21.98,1.09) v1(21.98,0.79) v1(21.98,0.49) v1(22.28,2.59) v1(22.28,2.29) v1(22.28,1.99) v1(22.28,1.09) v1(22.28,0.79) v1(22.28,0.49) v1(22.56,1.67) v1(22.56,1.37) v1(22.86,1.67) v1(22.86,1.37) v1(23.16,1.67) v1(23.16,1.37) v1(23.46,1.67) v1(23.46,1.37) v1(23.76,1.67) v1(23.76,1.37) v1(24.06,1.37) v1(33.92,127.77) v1(33.92,127.47) v1(33.92,127.17) v1(33.92,126.87) v1(33.92,126.57) v1(33.92,126.27) v1(33.92,125.97) v1(33.92,125.67) v1(34.22,127.77) v1(34.22,127.47) v1(34.22,127.17) v1(34.22,126.27) v1(34.22,125.97) v1(34.22,125.67) v1(34.49,126.93) v1(34.49,126.63) v1(34.79,126.93) v1(34.79,126.63) v1(35.09,127.23) v1(35.09,126.93) v1(35.09,126.63) v1(35.09,126.33) v1(35.39,127.23) v1(35.39,126.93) v1(35.39,126.63) v1(35.39,126.33) v1(35.69,127.23) v1(35.69,126.93) v1(35.69,126.63) v1(35.69,126.33) v1(35.99,127.23) v1(35.99,126.93) v1(35.99,126.63) v1(35.99,126.33) v1(36.29,127.23) v1(36.29,126.93) v1(36.29,126.63)
ANT_ID0: length 9.2
  TOP w0.06: J106.32 25.53,1.22 v1(25.52,1.23) ; J101.9 v1(37.8,127.17)
  BOTTOM w0.06: v1(37.8,127.17) 37.9,127.07 arc(37.93,127.06) 37.95,127.05 38.07,127.05 arc(38.1,127.04) 38.12,127.03 38.3,126.85 arc(38.32,126.83) 38.32,126.8 38.32,125.21 arc(38.33,125.18) 38.35,125.16 38.64,124.87 arc(38.65,124.84) 38.66,124.82 38.66,123.23 ; 25.38,5.06 25.38,3.17 25.33,3.12 25.33,1.72 25.49,1.56 25.49,1.26 v1(25.52,1.23)
AU_MICBIAS0: length 7.8
  TOP w0.06: J106.17 27.93,2.95 27.71,3.17 27.71,6.68 ; J101.24 40.6,125.37 40.34,125.1 40.34,122.75
BB_SUB_BATBOX_ADC3: length 9
  TOP w0.06: v1(26.38,1.57) 26.43,1.52 J106.29 ; J101.12 v1(38.85,127.3)
  BOTTOM w0.06: v1(38.85,127.3) 38.85,127.14 38.68,126.97 38.68,125.33 39.02,125 39.02,123.23 ; 26.39,5.06 26.39,2.75 26.25,2.61 26.25,1.7 v1(26.38,1.57)
BB_USB_ADC1: length 8.9
  TOP w0.06: J106.30 v1(26.13,1.23) ; J101.11 v1(38.5,127.17)
  BOTTOM w0.06: v1(38.5,127.17) 38.56,127.11 38.56,125.28 38.9,124.95 38.9,123.23 ; 26.27,5.06 26.27,2.8 26.13,2.66 v1(26.13,1.23)
BB_USB_ADC2: length 9
  TOP w0.06: J101.13 39.2,127 v1(39.33,126.88) ; J106.28 v1(26.73,1.23)
  BOTTOM w0.06: v1(26.73,1.23) 26.77,1.27 26.77,1.64 26.91,1.78 26.91,2.58 26.99,2.66 26.99,5.06 ; v1(39.33,126.88) 39.47,126.73 39.47,125.39 39.62,125.25 39.62,123.23
BPI_D_BUS0: length 8.9
  TOP w0.06: J106.26 v1(27.33,1.23) ; J101.15 v1(39.91,127.17)
  BOTTOM w0.06: v1(27.33,1.23) 27.33,1.57 27.15,1.75 27.15,2.48 27.23,2.56 27.23,5.06 ; 39.86,123.23 39.86,125.31 arc(39.85,125.34) 39.84,125.37 39.74,125.47 arc(39.72,125.49) 39.71,125.52 39.71,126.66 arc(39.72,126.68) 39.74,126.71 39.88,126.86 arc(39.9,126.88) 39.91,126.91 v1(39.91,127.17)
BPI_D_BUS4: length 8.8
  TOP w0.06: J101.14 v1(39.55,127.3) ; J106.27 v1(27.03,1.44)
  BOTTOM w0.06: 27.11,5.06 27.11,2.61 27.03,2.53 v1(27.03,1.44) ; 39.74,123.23 39.74,125.26 arc(39.73,125.29) 39.72,125.32 39.62,125.42 arc(39.6,125.44) 39.59,125.47 39.59,127.23 arc(39.59,127.26) 39.58,127.28 v1(39.55,127.3)
CARD_DET: length 124.8
  TOP w0.06: J102.37 5.45,8.02 7.55,10.12 7.55,17.06 14.62,24.14 14.62,116.85 10.58,120.89 10.58,123.38 8.5,125.46 J105.14
EINT_CTP: length 129.1
  TOP w0.06: J105.30 v1(6.05,127.03) ; J102.21 v1(3,6.44)
  BOTTOM w0.15: v1(6.05,127.03) 6.05,127.03 7.58,125.5 7.58,124.53 9.27,122.84 9.27,120.35 13.32,116.31 13.32,24.68 6.24,17.6 6.24,10.66 4.53,8.95 4.53,7.98 3,6.45 v1(3,6.44)
FINGER_SPI_CLK: length 127.9
  TOP w0.06: J102.13 v1(5.8,6.44) ; J105.38 v1(8.85,127.03)
  BOTTOM w0.06: v1(8.85,127.03) 8.85,126.7 8.77,126.61 8.77,125.02 10.46,123.33 10.46,120.84 14.5,116.8 14.5,24.19 7.43,17.11 7.43,10.17 5.72,8.46 5.72,7.16 5.8,7.07 v1(5.8,6.44)
FINGER_SPI_CS_N: length 128.3
  TOP w0.06: J102.16 v1(4.75,6.26) ; J105.35 v1(7.8,127.22)
  BOTTOM w0.06: v1(4.75,6.26) 4.75,6.65 5.36,7.26 5.36,8.61 7.07,10.32 7.07,17.26 14.14,24.34 14.14,116.65 10.1,120.69 10.1,123.18 8.41,124.87 8.41,126.43 7.8,127.04 v1(7.8,127.22)
FINGER_SPI_MISO: length 150.1
  TOP w0.06: J105.34 v1(7.45,127.03) ; J102.17 v1(4.4,6.44)
  TOP w0.15: v1(322.58,493.35) v1(326.58,493.35) ; v1(323.58,612.42) arc(324.58,613.3) 325.58,612.42 ; v1(323.58,532.42) arc(324.58,533.3) 325.58,532.42 ; v1(323.58,552.42) arc(324.58,553.3) 325.58,552.42 ; v1(323.58,572.42) arc(324.58,573.3) 325.58,572.42 ; v1(323.58,512.42) arc(324.58,513.3) 325.58,512.42 ; v1(323.58,592.42) arc(324.58,593.3) 325.58,592.42
  BOTTOM w0.06: v1(4.4,6.44) 4.4,6.47 5.24,7.31 5.24,8.66 6.95,10.37 6.95,17.31 14.02,24.39 14.02,116.6 9.98,120.64 9.98,123.13 8.29,124.82 8.29,126.38 7.63,127.03 v1(7.45,127.03)
FINGER_SPI_MOSI: length 128.1
  TOP w0.06: J105.36 v1(8.15,127.03) ; J102.15 v1(5.1,6.44)
  BOTTOM w0.06: v1(8.15,127.03) 8.53,126.66 8.53,124.92 10.22,123.23 10.22,120.74 14.26,116.7 14.26,24.29 7.19,17.21 7.19,10.27 5.48,8.56 5.48,7.21 5.1,6.83 v1(5.1,6.44)
FP_RST: length 127.9
  TOP w0.06: J102.14 v1(5.45,6.26) ; J105.37 v1(8.5,127.22)
  BOTTOM w0.06: v1(8.5,127.22) 8.5,127 8.65,126.86 8.65,124.97 10.34,123.28 10.34,120.79 14.38,116.75 14.38,24.24 7.31,17.16 7.31,10.22 5.6,8.51 5.6,7.16 5.45,7.01 v1(5.45,6.26)
GPIO_CTP_RSTB: length 128.4
  TOP w0.06: v1(9.33,127.01) 9.55,127.23 J105.40 ; v1(6.28,6.47) 6.5,6.25 J102.11
  BOTTOM w0.06: v1(6.28,6.47) 6.28,6.76 5.84,7.21 5.84,8.41 7.55,10.12 7.55,17.06 14.62,24.14 14.62,116.85 10.58,120.89 10.58,123.38 8.89,125.07 8.89,126.56 v1(9.33,127.01)
LCD_VCI_3V0: length 128.8
  TOP w0.06: J102.3 v1(9.3,6.48)
  TOP w0.15: J105.48 v1(12.35,127.03)
  BOTTOM w0.15: v1(9.3,6.48) 9.46,6.64 10.21,6.64 10.61,7.04 10.61,7.9 11.19,8.48 11.19,15.51 18.3,22.61 18.3,118.37 14.25,122.42 14.25,124.96 13.67,125.54 13.67,126.43 13.17,126.93 12.46,126.93 v1(12.35,127.03)
LCD_VDDI: length 128.9
  TOP w0.06: J102.19 v1(3.7,6.44) ; J105.32 v1(6.75,127.03)
  BOTTOM w0.15: v1(3.7,6.44) 4.95,7.7 4.95,8.78 6.66,10.48 6.66,17.43 13.74,24.5 13.74,116.48 9.69,120.53 9.69,123.01 8,124.71 8,125.78 v1(6.75,127.03)
LCD_VDDR_1V25: length 127.8
  TOP w0.15: J102.24 v1(1.95,6.26) 1.95,6.4 v1(1.82,6.53) ; v1(4.87,126.95) 5,127.08 v1(5,127.22) J105.27
  BOTTOM w0.9: 2.09,7.11 2.25,7.11 3.62,8.48 3.62,9.33 5.33,11.04 5.33,17.98 12.4,25.06 12.4,115.93 10.4,117.94 8.36,119.97 8.36,122.46 6.67,124.15 6.67,125.01 5.52,126.16
LCD_VDDR_1V25_FB: length 129.5
  TOP w0.15: J102.23 v1(2.3,6.44) ; J105.28 v1(5.35,127.03)
  BOTTOM w0.15: v1(2.3,6.44) 2.42,6.44 4.2,8.23 4.2,9.09 5.91,10.79 5.91,17.74 12.99,24.82 12.99,116.17 8.94,120.22 8.94,122.7 7.25,124.4 7.25,125.25 5.47,127.03 v1(5.35,127.03)
MAIN_MIC_M: length 7.7
  TOP w0.06: 27.47,6.68 27.47,2.53 27.33,2.39 J106.15 ; J101.26 39.91,125.65 40.1,125.46 40.1,122.75
MAIN_MIC_P: length 7.6
  TOP w0.06: 27.59,6.68 27.59,3.12 27.63,3.08 J106.16 ; J101.25 40.22,125.82 40.22,122.75
MIPI2_D_SCLK: length 7.7
  TOP w0.06: J101.28 39.2,125.32 39.38,125.15 39.38,122.75 ; J106.13 26.75,2.21 26.75,6.68
MIPI2_D_SDATA: length 7.9
  TOP w0.06: J101.29 38.85,125.5 39.26,125.1 39.26,122.75 ; 26.63,6.68 26.63,2.52 26.43,2.32 J106.12
MIPI_DSI0_CLK_M_CON: length 124.4
  TOP w0.085: J102.43 7.55,7.77 9.12,9.34 arc(9.14,9.37) 9.15,9.42 9.15,16.35 arc(9.16,16.39) 9.18,16.43 16.19,23.44 arc(16.22,23.48) 16.23,23.52 16.23,117.47 arc(16.22,117.51) 16.19,117.55 12.18,121.56 12.18,124.1 10.6,125.68 J105.8
MIPI_DSI0_CLK_P_CON: length 124.2
  TOP w0.085: J102.44 7.9,7.86 9.25,9.21 arc(9.31,9.3) 9.33,9.42 9.33,16.28 arc(9.34,16.32) 9.37,16.35 16.32,23.31 arc(16.39,23.41) 16.41,23.52 16.41,117.47 arc(16.39,117.58) 16.32,117.68 12.37,121.64 12.37,124.13 arc(12.36,124.17) 12.34,124.21 10.95,125.59 J105.7
MIPI_DSI0_LANE0_M_CON: length 124.6
  TOP w0.085: J102.41 6.85,7.73 8.73,9.61 8.73,16.53 arc(8.74,16.57) 8.76,16.6 8.78,16.62 15.77,23.61 arc(15.8,23.65) 15.81,23.69 15.81,117.3 arc(15.8,117.34) 15.77,117.37 11.76,121.38 11.76,123.89 9.9,125.75 J105.10
MIPI_DSI0_LANE0_P_CON: length 124.5
  TOP w0.085: J105.9 10.25,125.66 11.92,123.99 arc(11.94,123.96) 11.95,123.92 11.95,121.46 15.9,117.5 arc(15.97,117.41) 15.99,117.3 15.99,23.69 arc(15.97,23.58) 15.9,23.48 8.91,16.49 8.91,9.47 7.2,7.75 J102.42
MIPI_DSI0_LANE1_M_CON: length 124.2
  TOP w0.085: J102.45 8.25,7.88 9.57,9.2 9.57,16.1 arc(9.59,16.21) 9.66,16.31 16.61,23.27 arc(16.64,23.3) 16.65,23.34 16.65,117.69 12.6,121.73 12.6,124.27 11.3,125.57 J105.6
MIPI_DSI0_LANE1_P_CON: length 124
  TOP w0.085: J102.46 8.6,7.97 9.72,9.09 arc(9.75,9.12) 9.75,9.17 9.75,16.1 arc(9.76,16.14) 9.79,16.18 16.8,23.19 arc(16.82,23.23) 16.83,23.27 16.83,117.72 arc(16.82,117.76) 16.8,117.8 12.79,121.81 12.79,124.35 11.65,125.49 J105.5
MIPI_DSI0_LANE2_M_CON: length 123.7
  TOP w0.085: J102.49 9.65,8.09 10.38,8.82 arc(10.4,8.85) 10.41,8.89 10.41,15.83 arc(10.42,15.87) 10.44,15.91 17.45,22.92 arc(17.48,22.95) 17.49,23 17.49,117.99 arc(17.48,118.03) 17.45,118.07 13.47,122.05 arc(13.45,122.08) 13.44,122.13 13.44,124.58 arc(13.43,124.62) 13.41,124.65 12.7,125.36 J105.2
MIPI_DSI0_LANE2_P_CON: length 123.5
  TOP w0.085: J105.1 13.05,125.27 13.54,124.78 arc(13.61,124.69) 13.63,124.58 13.63,122.16 17.58,118.2 arc(17.65,118.1) 17.67,117.99 17.67,23 arc(17.65,22.88) 17.58,22.79 10.63,15.83 arc(10.6,15.79) 10.59,15.75 10.59,8.89 arc(10.57,8.78) 10.51,8.69 10,8.18 J102.50
MIPI_DSI0_LANE3_M_CON: length 123.9
  TOP w0.085: J105.4 12,125.47 13.02,124.45 13.02,121.91 17.07,117.86 17.07,23.17 arc(17.06,23.13) 17.03,23.09 10.08,16.13 arc(10.01,16.04) 9.99,15.93 9.99,9.02 8.95,7.98 J102.47
MIPI_DSI0_LANE3_P_CON: length 123.8
  TOP w0.085: J102.48 9.3,8.07 10.14,8.91 arc(10.17,8.95) 10.17,8.99 10.17,15.93 arc(10.18,15.97) 10.21,16 17.22,23.02 arc(17.24,23.05) 17.25,23.09 17.25,117.89 arc(17.24,117.94) 17.22,117.97 13.21,121.98 13.21,124.52 12.35,125.38 J105.3
NFC_SWP: length 145
  TOP w0.06: J105.12 9.2,125.56 9.13,125.48 9.13,125.17 10.82,123.48 10.82,120.99 14.86,116.95 14.86,24.04 7.79,16.96 7.79,10.02 6.08,8.31 6.08,7.96 6.15,7.89 J102.39
  TOP w0.15: v1(323.58,494.4) arc(324.58,493.51) 325.58,494.4 ; v1(323.58,534.4) arc(324.58,533.51) 325.58,534.4 ; v1(325.58,614.4) arc(324.58,613.51) 323.58,614.4 ; v1(323.58,594.4) arc(324.58,593.51) 325.58,594.4 ; v1(323.58,574.4) arc(324.58,573.51) 325.58,574.4 ; v1(323.58,514.4) arc(324.58,513.51) 325.58,514.4 ; v1(323.58,554.4) arc(324.58,553.51) 325.58,554.4
NFC_VDD_SIM_1_OUT: length 126.8
  TOP w0.17: J102.31 3.35,7.79 3.55,7.99 3.74,7.99 3.86,8.11 4.04,8.11 4.16,8.23 4.34,8.23 4.46,8.35 4.64,8.35 6.77,10.49 6.77,17.38 13.85,24.46 13.85,116.53 9.8,120.57 9.8,123.06 7.86,125 7.45,125 7.09,125.36 6.72,125.36 6.4,125.69 J105.20
OLED_NTC: length 9.1
  TOP w0.06: J101.10 v1(38.16,127.3) ; J106.31 25.83,1.53 v1(25.88,1.57)
  BOTTOM w0.06: 26.15,5.06 26.15,2.85 26.01,2.71 26.01,1.71 v1(25.88,1.57) ; v1(38.16,127.3) 38.16,127.17 38.44,126.88 38.44,125.23 38.78,124.9 38.78,123.23
OLED_RST: length 129.5
  TOP w0.06: J105.46 v1(11.65,127.03) ; J102.5 v1(8.6,6.48)
  BOTTOM w0.06: v1(8.6,6.48) 9.05,6.93 10.09,6.93 10.33,7.16 10.33,8.02 10.91,8.6 10.91,15.63 18.01,22.73 18.01,118.26 13.97,122.3 13.97,124.84 13.38,125.42 13.38,126.31 13.05,126.64 12.23,126.64 12.05,126.81 11.83,127.03 v1(11.65,127.03)
OLED_TE: length 129.1
  TOP w0.06: J102.4 v1(8.95,6.34) ; J105.47 v1(12,127.22)
  BOTTOM w0.06: v1(8.95,6.34) 8.95,6.48 9.28,6.81 10.14,6.81 10.45,7.11 10.45,7.97 11.03,8.55 11.03,15.58 18.13,22.68 18.13,118.31 14.09,122.35 14.09,124.89 13.5,125.47 13.5,126.36 13.1,126.76 12.28,126.76 12,127.04 v1(12,127.22)
SIM1_SCLK: length 127.8
  TOP w0.06: J105.23 5.35,125.77 5.58,125.53 5.76,125.53 5.88,125.42 6.06,125.42 6.53,124.95 6.91,124.95 7.27,124.59 7.69,124.59 9.39,122.89 9.39,120.4 13.43,116.36 13.43,24.63 6.36,17.55 6.36,10.66 4.46,8.77 4.28,8.77 4.16,8.65 3.98,8.65 3.86,8.53 3.68,8.53 3.56,8.41 3.36,8.41 3.01,8.06 2.83,8.06 2.71,7.94 2.53,7.94 2.3,7.71 J102.28
SIM1_SIO: length 127
  TOP w0.06: J102.30 3,7.71 3.46,8.17 3.66,8.17 3.78,8.29 3.96,8.29 4.08,8.41 4.26,8.41 4.38,8.53 4.56,8.53 6.6,10.56 6.6,17.45 13.67,24.53 13.67,116.46 9.63,120.5 9.63,122.99 7.79,124.83 7.37,124.83 7.01,125.19 6.63,125.19 6.05,125.77 J105.21
SIM1_SRST: length 127.4
  TOP w0.06: J102.29 2.65,7.71 2.88,7.94 3.06,7.94 3.41,8.29 3.61,8.29 3.73,8.41 3.91,8.41 4.03,8.53 4.21,8.53 4.33,8.65 4.51,8.65 6.48,10.61 6.48,17.5 13.55,24.58 13.55,116.41 9.51,120.45 9.51,122.94 7.74,124.71 7.32,124.71 6.96,125.07 6.58,125.07 6.11,125.54 5.93,125.54 5.7,125.77 J105.22
SIM2_SCLK_CARD: length 126
  TOP w0.06: J102.33 4.05,7.71 4.28,7.94 4.46,7.94 4.58,8.06 4.76,8.06 7.07,10.37 7.07,17.26 14.14,24.34 14.14,116.65 10.1,120.69 10.1,123.18 7.98,125.3 7.57,125.3 7.19,125.67 7.1,125.77 J105.18
SIM2_SIO_CARD: length 125.2
  TOP w0.06: J105.16 7.8,125.77 8.03,125.54 8.08,125.54 10.34,123.28 10.34,120.79 14.38,116.75 14.38,24.24 7.31,17.16 7.31,10.27 4.75,7.71 J102.35
SIM2_SRST_CARD: length 125.6
  TOP w0.06: J102.34 4.4,7.71 4.63,7.94 4.81,7.94 7.19,10.32 7.19,17.21 14.26,24.29 14.26,116.7 10.22,120.74 10.22,123.23 8.03,125.42 7.77,125.42 7.45,125.73 J105.17
SPK_OUT_M: length 9.7
  TOP w0.06: J106.21 v1(28.83,1.39) ; J106.22 28.53,1.16 v1(28.58,1.22)
  TOP w0.15: J101.19 41.3,127.16 v1(41.43,127.03) ; v1(41.59,127.29) 41.66,127.35 J101.20
  BOTTOM w0.5: 41.48,126.77 41.48,125.25 41.04,124.81 41.04,123.23 ; v1(28.83,1.39) 28.69,1.53 28.69,3.17 28.41,3.46 28.41,5.06
SPK_OUT_P: length 7
  TOP w0.5: 41.04,122.75 41.04,124.81 41.44,125.21 ; 28.69,2.47 28.69,3.17 28.41,3.46 28.41,6.68
TP_1V8: length 128.1
  TOP w0.06: J102.2 v1(9.65,6.34)
  TOP w0.15: v1(13.96,125.66) 14.04,125.58 14.04,122.33 18.09,118.29 18.09,22.7 10.98,15.59 10.98,7.86 v1(10.9,7.78) ; J105.49 v1(12.7,127.22)
  BOTTOM w0.06: v1(10.9,7.78) 10.79,7.67 10.79,6.97 10.29,6.47 9.79,6.47 v1(9.65,6.34)
  BOTTOM w0.15: v1(12.7,127.22) 12.78,127.14 13.26,127.14 13.88,126.52 13.88,125.74 v1(13.96,125.66)
TP_SPI_CLK: length 129.4
  TOP w0.06: J102.7 v1(7.9,6.48) ; J105.44 v1(10.95,127.03)
  BOTTOM w0.06: v1(7.9,6.48) 7.37,7.01 6.88,7.01 6.68,7.21 6.68,8.06 8.39,9.77 8.39,16.71 15.46,23.79 15.46,117.2 11.42,121.24 11.42,123.73 9.73,125.42 9.73,126.35 9.87,126.49 10.41,126.49 v1(10.95,127.03)
TP_SPI_CS: length 129.1
  TOP w0.06: J105.43 v1(10.6,127.22) ; J102.8 v1(7.55,6.34)
  BOTTOM w0.06: v1(10.6,127.22) 10.6,127.01 10.21,126.61 9.82,126.61 9.61,126.4 9.61,125.37 11.3,123.68 11.3,121.19 15.34,117.15 15.34,23.84 8.27,16.76 8.27,9.82 6.56,8.11 6.56,7.16 6.83,6.89 7.17,6.89 7.55,6.51 v1(7.55,6.34)
TP_SPI_MI: length 128.3
  TOP w0.06: J105.41 v1(9.9,127.22) ; J102.10 v1(6.85,6.34)
  BOTTOM w0.06: v1(9.9,127.22) 9.9,127.04 9.37,126.5 9.37,125.27 11.06,123.58 11.06,121.09 15.1,117.05 15.1,23.94 8.03,16.86 8.03,9.92 6.32,8.21 6.32,7.06 6.85,6.53 v1(6.85,6.34)
TP_SPI_MO: length 128.6
  TOP w0.06: J105.42 v1(10.25,127.03) ; J102.9 v1(7.2,6.48)
  BOTTOM w0.06: v1(10.25,127.03) 10.07,127.03 9.49,126.45 9.49,125.32 11.18,123.63 11.18,121.14 15.22,117.1 15.22,23.89 8.15,16.81 8.15,9.87 6.44,8.16 6.44,7.11 6.78,6.77 6.91,6.77 v1(7.2,6.48)
USB_CC1: length 7.8
  TOP w0.15: J101.34 37.1,124.75 37.49,124.36 37.49,122.75 ; J106.7 24.93,2.39 24.8,2.52 24.8,6.68
USB_CC2: length 7.8
  TOP w0.15: J101.35 36.75,125.6 36.89,125.46 36.89,124.67 37.28,124.28 37.28,122.75 ; 24.59,6.68 24.59,2.43 24.63,2.39 J106.6
USB_CONTACT_IN: length 9.3
  TOP w0.06: J101.17 v1(40.6,127.17) ; J106.24 v1(27.93,1.23)
  BOTTOM w0.06: 40.58,123.23 40.58,125 41.02,125.44 41.02,126.76 v1(40.6,127.17) ; 27.95,5.06 27.95,3.26 28.23,2.98 28.23,1.78 27.93,1.48 v1(27.93,1.23)
USB_DM_CON: length 7.8
  TOP w0.085: J106.9 25.55,2.21 25.55,6.68 ; J101.32 37.8,125.03 38.15,124.68 arc(38.17,124.65) 38.18,124.6 38.18,122.75
USB_DP_CON: length 7.8
  TOP w0.085: J101.31 38.16,125.6 38.03,125.48 38.03,125.06 38.28,124.81 arc(38.35,124.72) 38.37,124.6 38.37,122.75 ; J106.10 25.74,2.28 25.74,6.68
VFP_PMU: length 129.4
  TOP w0.15: J105.50 13.05,127.74 13.18,127.87 14.14,127.87 14.25,127.75 14.25,122.42 18.3,118.37 18.3,22.61 11.19,15.51 11.19,5.76 11.04,5.61 10.15,5.61 10,5.76 J102.1
VIBR_PMU: length 9.1
  TOP w0.15: v1(24.93,1.23) J106.34
  TOP w0.17: J101.7 v1(37.1,127.17)
  BOTTOM w0.15: 25.21,5.06 25.21,3.24 25.17,3.19 25.17,1.47 v1(24.93,1.23)
  BOTTOM w0.17: v1(37.1,127.17) 37.45,126.82 37.45,124.89 37.83,124.5 37.83,123.23
VSIM2_PMU_CARD: length 125
  TOP w0.06: J102.36 5.1,7.84 7.43,10.17 7.43,17.11 14.5,24.19 14.5,116.8 10.46,120.84 10.46,123.33 8.15,125.64 J105.15
VSYS:
  vias: v1(0.55,7.75) v1(0.55,7.45) v1(0.55,7.15) v1(0.55,6.85) v1(0.55,6.55) v1(0.55,6.25) v1(0.55,5.95) v1(0.85,7.75) v1(0.85,7.45) v1(0.85,7.15) v1(0.85,6.85) v1(0.85,6.55) v1(0.85,6.25) v1(0.85,5.95) v1(1.15,7.75) v1(1.2,6.67) v1(3.61,127.69) v1(3.61,127.39) v1(3.61,127.09) v1(3.61,126.79) v1(3.61,126.49) v1(3.61,126.19) v1(3.61,125.89) v1(3.91,127.69) v1(3.91,127.39) v1(3.91,127.09) v1(3.91,126.79) v1(3.91,126.49) v1(3.91,126.19) v1(3.91,125.89)
VTP_PMU: length 129
  TOP w0.06: J102.20 v1(3.35,6.26) ; J105.31 v1(6.4,127.22)
  BOTTOM w0.15: v1(3.35,6.26) 3.35,6.5 4.74,7.9 4.74,8.86 6.45,10.57 6.45,17.52 13.53,24.59 13.53,116.4 9.48,120.44 9.48,122.93 7.79,124.62 7.79,125.58 6.4,126.97 v1(6.4,127.22)

## Copper pours and planes (outline as drawn; the poured copper is in the pictures)
VBUS_USB_IN on TOP (solid shape): 24.1,2.55 24.1,1.92 24.4,1.62 24.4,0.41 24.32,0.33 21.66,0.33 21.5,0.48 21.5,2.67 21.61,2.77 23.88,2.77
VBUS_USB_IN on TOP (solid shape): 36.5,127.91 36.5,126.51 36.14,126.15 36.14,125.5 36.02,125.38 33.75,125.38 33.63,125.51 33.63,127.83 33.73,127.94 36.47,127.94
LCD_VDDR_1V25 on BOTTOM (solid shape): 5.15,127.3 5.15,127.12 5.14,127.11 5.14,126.94 5.29,126.79 5.5,126.79 5.98,126.31 5.35,125.69 4.69,126.35 4.69,127.31 4.75,127.37 5.09,127.37
LCD_VDDR_1V25 on BOTTOM (solid shape): 2.67,6.99 2.67,6.9 2.42,6.65 2.2,6.65 2.08,6.53 2.08,6.36 2.12,6.31 2.12,6.18 2.04,6.1 1.86,6.1 1.63,6.32 1.63,7.28 1.88,7.53 2.13,7.53
VSYS on TOP (solid shape): 1.37,7.87 1.37,5.68 1.22,5.53 0.45,5.53 0.37,5.61 0.37,7.87 0.44,7.94 1.3,7.94
VSYS on TOP (solid shape): 4.37,127.8 4.37,125.5 4.28,125.4 3.46,125.4 3.37,125.5 3.37,127.79 3.44,127.87 4.31,127.87

Small or netless copper shapes (teardrops, artwork), in the pictures only: 2 on TOP, 2 on BOTTOM
